# EAGLE board OBI_SlaveBoard_rev1 (EAGLE 7.2.0)
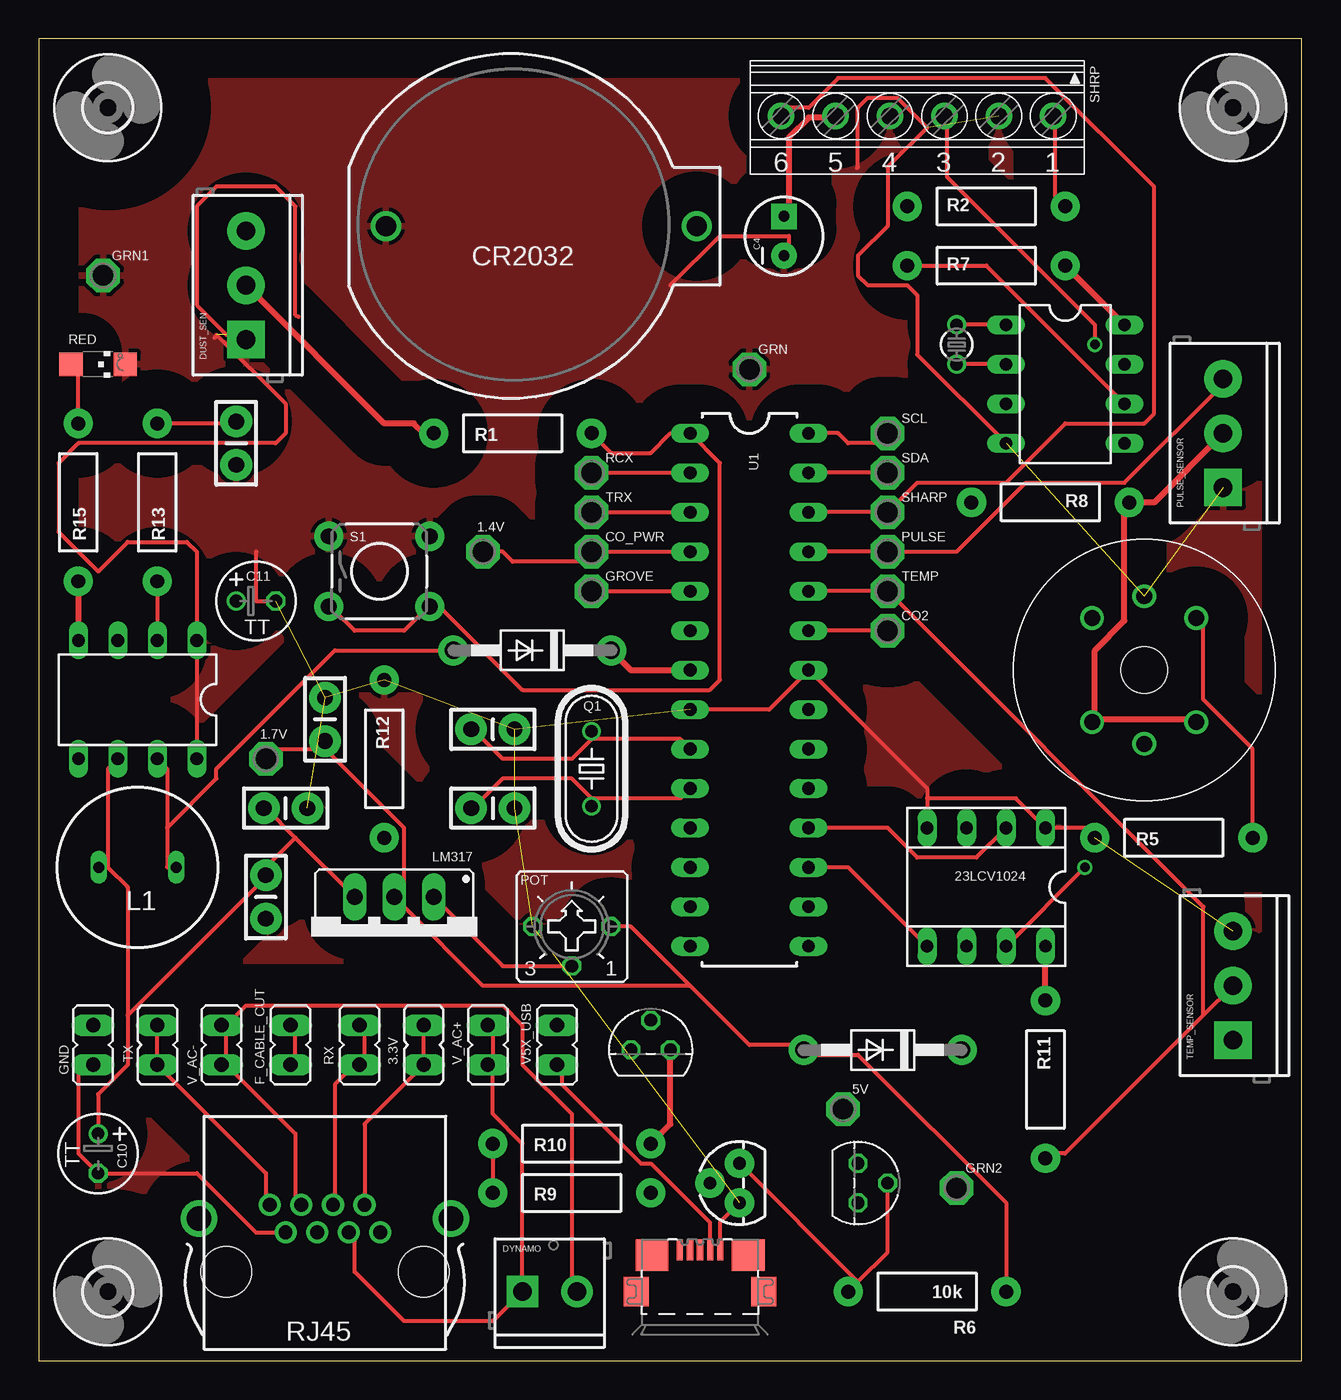
[diagram p0: board, top side]
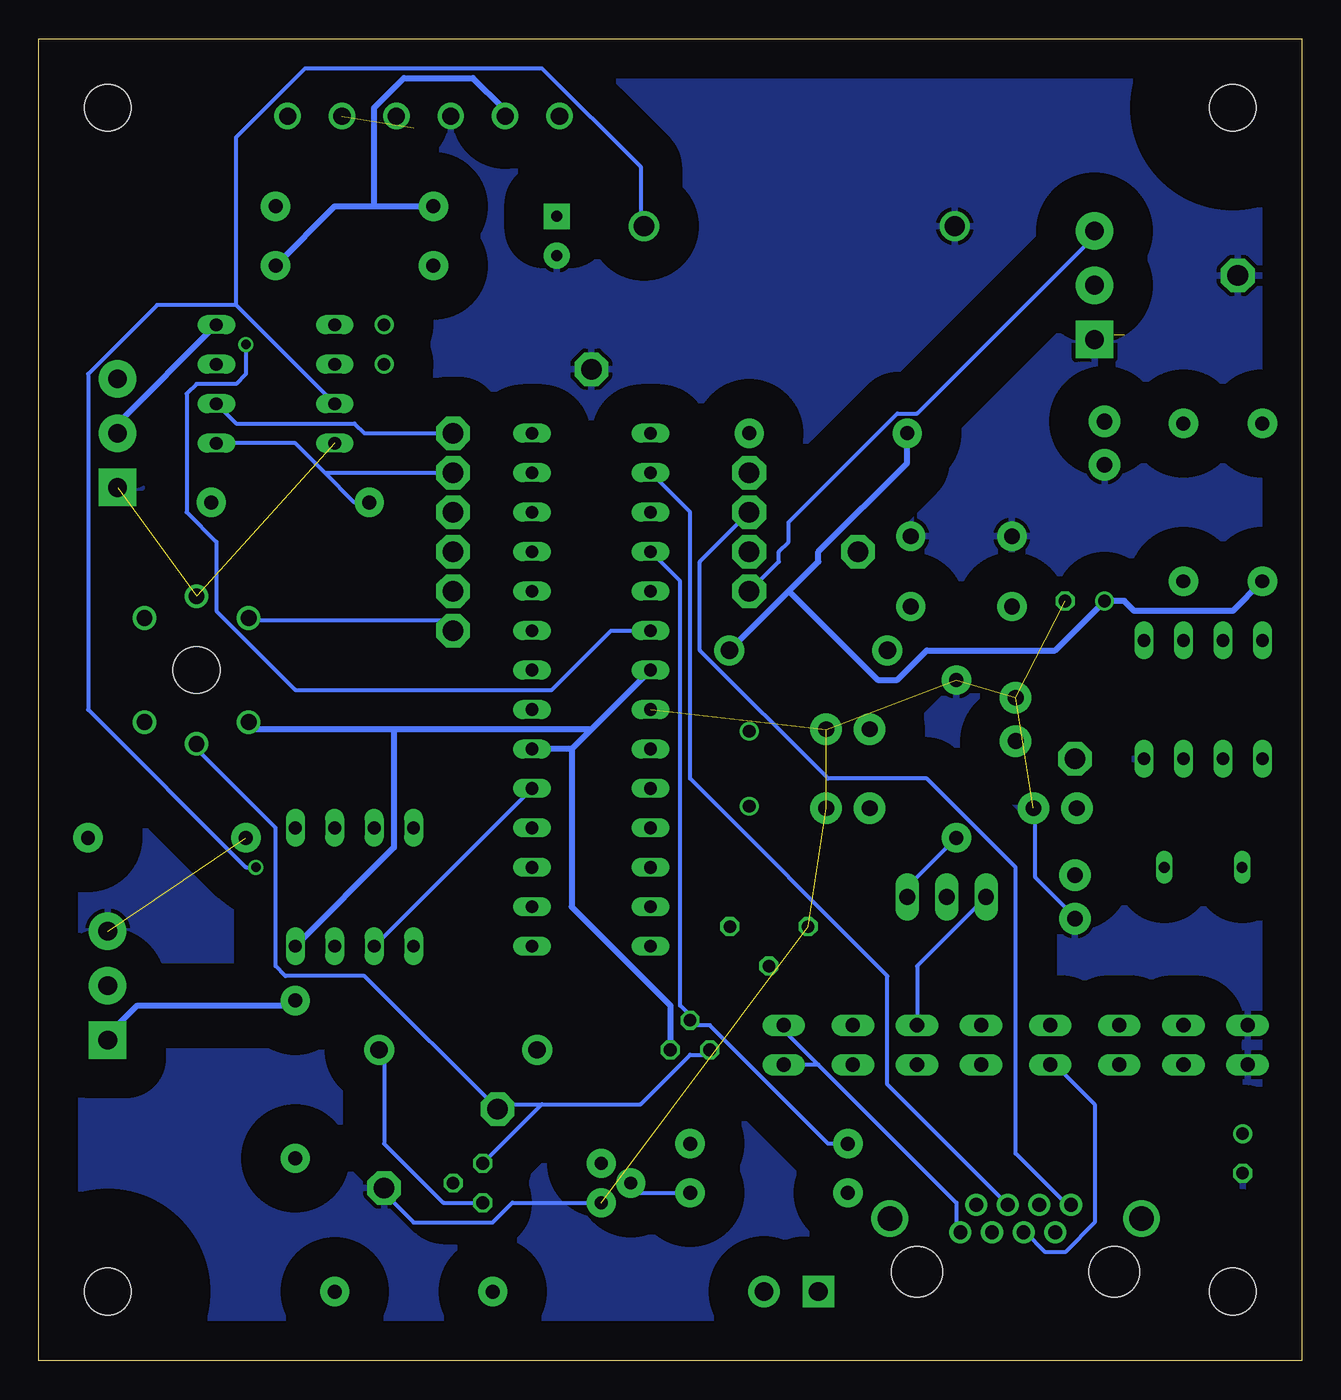
[diagram p1: board, bottom side, seen from below]

Size 81.27 x 85.08 mm. Coordinates in mm from the lower left corner, seen from the top.
Outline: 0,0 81.27,0 81.27,85.08 0,85.08 0,0
Copper layers (1*16): Top 0.0356mm / dielectric 1.5011mm / Bottom 0.0356mm
Design rules "OSH-Park-2-layer": minimum track width 6mil, minimum drill 13mil, track to track 6mil, track to pad 6mil, pad to pad 6mil, via to via 6mil, smd to smd 6mil, copper to edge 15mil, drill to drill 6mil, minimum pad ring 7mil, minimum via ring 7mil, stop-mask expansion 3mil, vias tented up to drill 0mil, thermal gap 10mil
Net classes: 1 Power: width 0.381 mm

## Footprints (pad centres in the part's own frame; a part is rotated, then mirrored left to right if it is on the bottom)
P1-13 = drill 1.321 pad 2.159 octagon: TP 0,0
JP1 = drill 0.914 long: 1 0,-1.27; 2 0,1.27
SOCKET-08 = drill 0.813 long: 1 -3.81,-3.81; 2 -1.27,-3.81; 3 1.27,-3.81; 4 3.81,-3.81; 5 3.81,3.81; 6 1.27,3.81; 7 -1.27,3.81; 8 -3.81,3.81
CAP-PTH-SMALL-KIT = drill 1.016 pad 2.032: 1 -1.397,0; 2 1.397,0
CPOL-RADIAL-10UF-25V = drill 0.7 pad 1.651 square: 1 1.27,0 | drill 0.7 pad 1.651: 2 -1.27,0
TT2D5 = drill 0.813: + -1.27,0 | drill 0.813 octagon: - 1.27,0
MQ-3 = drill 1.016: A1 -3.35,3.35; A2 -3.35,-3.35; B1 3.35,3.35; B2 3.35,-3.35; HA -4.75,0; HB 4.75,0 | hole 3: 0,0
BATTCOM_20MM_PTH = drill 1.3: 1 11.85,0; 2 -8.15,0
DO41-10 = drill 1.118 pad 1.93: A 5.08,0; C -5.08,0
SCREWTERMINAL-3.5MM-3 = drill 1.2 pad 2.413 square: 1 0,0 | drill 1.2 pad 2.413: 2 3.5,0; 3 7,0
SCREWTERMINAL-3.5MM-2 = drill 1.2 pad 2.032 square: 1 0,0 | drill 1.2 pad 2.032: 2 3.5,0
DIL08 = drill 0.813 long: 1 -3.81,-3.81; 2 -1.27,-3.81; 3 1.27,-3.81; 4 3.81,-3.81; 5 3.81,3.81; 6 1.27,3.81; 7 -1.27,3.81; 8 -3.81,3.81
BS11 = drill 0.7 long: 1 -2.5,0; 2 2.5,0
317TS = drill 1.016 long: 1 -2.54,-2.54; 2 0,-2.54; 3 2.54,-2.54
ZX62R-B-5P = smd 1.35 x 0.4: 1 2.675,-1.3; 2 2.675,-0.65; 3 2.675,0; 4 2.675,0.65; 5 2.675,1.3 | smd 1.9 x 1.6: M1 0,-4.1; M2 0,4.1 | smd 2 x 2.1: M3 2.35,3.1; M4 2.35,-3.1
CT6 = drill 0.813 octagon: A 2.515,0; E -2.515,0; S 0,-2.54
HC49/S = drill 0.813: 1 -2.413,0; 2 2.413,0
TO-92 = drill 0.813 pad 1.88: 1 -1.27,0; 2 0,1.905; 3 1.27,0
TO92 = drill 0.813 octagon: 1 1.27,0; 2 0,1.905; 3 -1.27,0
TC26V = drill 0.813: 1 -1.27,0; 2 1.27,0
AXIAL-0.4 = drill 0.9 pad 1.88: P$1 -5.08,0; P$2 5.08,0
CHIPLED_1206 = smd 1.5 x 1.5: A 0,-1.75; C 0,1.75
0446200002 = drill 0.889 pad 1.422: 1 3.556,2.54; 2 2.54,4.318; 3 1.524,2.54; 4 0.508,4.318; 5 -0.508,2.54; 6 -1.524,4.318; 7 -2.54,2.54; 8 -3.556,4.318 | drill 1.575 pad 2.286: S@1 -8.103,3.429; S@2 8.103,3.429 | hole 3.251: 6.35,0; -6.35,0
TACTILE-PTH = drill 1.016 pad 1.88: 1 -3.251,2.261; 2 3.251,2.261; 3 -3.251,-2.261; 4 3.251,-2.261
1751280 = drill 1.1 pad 1.7: 1 -8.75,-0.1; 2 -5.25,-0.1; 3 -1.75,-0.1; 4 1.75,-0.1; 5 5.25,-0.1; 6 8.75,-0.1
DIL28-3 = drill 0.813 long: 1 -16.51,-3.81; 2 -13.97,-3.81; 3 -11.43,-3.81; 4 -8.89,-3.81; 5 -6.35,-3.81; 6 -3.81,-3.81; 7 -1.27,-3.81; 8 1.27,-3.81; 9 3.81,-3.81; 10 6.35,-3.81; 11 8.89,-3.81; 12 11.43,-3.81; 13 13.97,-3.81; 14 16.51,-3.81; 15 16.51,3.81; 16 13.97,3.81; 17 11.43,3.81; 18 8.89,3.81; 19 6.35,3.81; 20 3.81,3.81; 21 1.27,3.81; 22 -1.27,3.81; 23 -3.81,3.81; 24 -6.35,3.81; 25 -8.89,3.81; 26 -11.43,3.81; 27 -13.97,3.81; 28 -16.51,3.81
3,0 = hole 3: 0,0

## Placement (x,y rotation side)
1.4V  TPPAD1-13  [P1-13]  28.57,52.07 0 top
1.7V  TPPAD1-13  [P1-13]  14.61,38.73 0 top
3.3V  [JP1]  24.77,20.32 0 top
5V  TPPAD1-13  [P1-13]  51.75,16.19 0 top
23LCV1024  [SOCKET-08]  60.96,30.48 180 top
C1  22pF  [CAP-PTH-SMALL-KIT]  29.21,40.64 180 top
C2  22pF  [CAP-PTH-SMALL-KIT]  29.21,35.56 0 top
C4  220uF  [CPOL-RADIAL-10UF-25V]  47.94,72.39 90 top
C5  0.1uF  [CAP-PTH-SMALL-KIT]  15.88,35.56 180 top
C6  1uF  [CAP-PTH-SMALL-KIT]  18.41,41.27 270 top
C8  0.01uF  [CAP-PTH-SMALL-KIT]  12.7,59.05 90 top
C9  0.1uF  [CAP-PTH-SMALL-KIT]  14.61,29.84 270 top
C10  100uF  [TT2D5]  3.81,13.34 270 top
C11  100uF  [TT2D5]  13.97,48.9 0 top
CO2  TPPAD1-13  [P1-13]  54.61,46.99 0 top
CO2_SENSOR  METHANE_SENSOR  [MQ-3]  71.12,44.45 90 top
CO_PWR  TPPAD1-13  [P1-13]  35.56,52.07 0 top
CR2032  [BATTCOM_20MM_PTH]  30.48,73.03 0 top
D1  1N5817-B  [DO41-10]  31.75,45.72 180 top
D4  1N5817-B  [DO41-10]  54.29,20 180 top
DUST_SEN  [SCREWTERMINAL-3.5MM-3]  13.34,65.72 90 top
DYNAMO  [SCREWTERMINAL-3.5MM-2]  31.11,4.45 0 top
F_CABLE_CUT  [JP1]  16.19,20.32 0 top
FRAME1  FRAME-LEDGER  [CREATIVE_COMMONS]  -66.04,-27.94 0 top  (outside the outline)
GND  [JP1]  3.49,20.32 0 top
GRN  TPPAD1-13  [P1-13]  45.72,63.82 0 top
GRN1  TPPAD1-13  [P1-13]  4.13,69.85 0 top
GRN2  TPPAD1-13  [P1-13]  59.05,11.11 0 top
GROVE  TPPAD1-13  [P1-13]  35.56,49.53 0 top
IC2  DS1307  [DIL08]  66.04,62.87 270 top
L1  10uH  [BS11]  6.35,31.75 180 top
LM317  [317TS]  22.86,27.3 180 top
MICROB  MICRO-USB-ZX62R-B-5P  [ZX62R-B-5P]  42.55,4.45 90 top
POT  10k  [CT6]  34.29,27.94 0 top
PULSE  TPPAD1-13  [P1-13]  54.61,52.07 0 top
PULSE_SENSOR  [SCREWTERMINAL-3.5MM-3]  76.2,56.2 90 top
Q1  [HC49/S]  35.56,38.1 90 top
Q3  2N3904  [TO-92]  45.09,11.43 90 top
Q4  BSS110  [TO92]  52.7,11.43 270 top
Q5  BSS110  [TO92]  39.37,20 0 top
Q6  32.768 kHz  [TC26V]  59.05,65.41 270 top
R1  10K  [AXIAL-0.4]  30.48,59.69 180 top
R2  150  [AXIAL-0.4]  60.96,74.3 0 top
R5  10K  [AXIAL-0.4]  73.03,33.66 180 top
R6  10k  [AXIAL-0.4]  57.15,4.45 180 top
R7  4.7k  [AXIAL-0.4]  60.96,70.48 0 top
R8  4.7k  [AXIAL-0.4]  65.09,55.24 0 top
R9  4.7k  [AXIAL-0.4]  34.29,10.79 180 top
R10  10k  [AXIAL-0.4]  34.29,13.97 180 top
R11  10K  [AXIAL-0.4]  64.77,18.1 90 top
R12  220  [AXIAL-0.4]  22.23,38.73 90 top
R13  20k  [AXIAL-0.4]  7.62,55.24 270 top
R15  180  [AXIAL-0.4]  2.54,55.24 270 top
RCX  TPPAD1-13  [P1-13]  35.56,57.15 0 top
RED  [CHIPLED_1206]  3.81,64.14 270 top
RJ45  0446200002  [0446200002]  18.41,5.71 0 top
RX  [JP1]  20.64,20.32 0 top
S1  [TACTILE-PTH]  21.91,50.8 0 top
SCL  TPPAD1-13  [P1-13]  54.61,59.69 0 top
SDA  TPPAD1-13  [P1-13]  54.61,57.15 0 top
SHARP  TPPAD1-13  [P1-13]  54.61,54.61 0 top
SHRP  1751280  [1751280]  56.52,80.01 180 top
TEMP  TPPAD1-13  [P1-13]  54.61,49.53 0 top
TEMP_SENSOR  [SCREWTERMINAL-3.5MM-3]  76.83,20.64 90 top
TRX  TPPAD1-13  [P1-13]  35.56,54.61 0 top
TX  [JP1]  7.62,20.32 0 top
U1  ATMEGA328P_PDIP  [DIL28-3]  45.72,43.18 270 top
U$1  [3,0]  4.45,4.45 0 top
U$2  [3,0]  4.45,80.64 0 top
U$3  [3,0]  76.83,80.64 0 top
U$4  [3,0]  76.83,4.45 0 top
V5X_USB  [JP1]  33.34,20.32 0 top
V_AC+  [JP1]  28.89,20.32 0 top
V_AC-  [JP1]  11.75,20.32 0 top
V_BOOST  LT1302  [DIL08]  6.35,42.55 180 top

## Library data of the parts
1.4V 1.7V 5V CO2 CO_PWR GRN GRN1 GRN2 GROVE PULSE RCX SCL SDA SHARP TEMP TRX = testpad
3.3V F_CABLE_CUT GND RX TX V5X_USB V_AC+ V_AC- = jumper
23LCV1024 = ic-package
C1 = SparkFun-Passives; C1: 22pF
C2 = SparkFun-Passives; C2: 22pF
C4 = SparkFun-Capacitors
C5 C6 C8 C9 R1 R5 R7 R8 R15 = SparkFun-Passives
C10 C11 = rcl
CO2_SENSOR = SparkFun-Sensors
CR2032 = SparkFun-Electromechanical
D1 D4 IC2 RED V_BOOST = adafruit
DUST_SEN PULSE_SENSOR TEMP_SENSOR = SparkFun-Connectors
DYNAMO = SparkFun-Connectors; PROD_ID: CONN-08399
FRAME1 = SparkFun-Aesthetics
L1 = inductor-neosid; OC_FARNELL: unknown; OC_NEWARK: unknown
LM317 = v-reg
MICROB = con-hirose
POT = pot
Q1 = crystal; OC_FARNELL: 1667008; OC_NEWARK: unknown
Q3 = SparkFun-DiscreteSemi; PROD_ID: TRANS-08447
Q4 Q5 = transistor-fet
Q6 = crystal; OC_FARNELL: unknown; OC_NEWARK: unknown
R2 R6 R9-R13 = SparkFun-Resistors
RJ45 = con-molex; MF: MOLEX; MPN: 0446200002; OC_FARNELL: 9251910
S1 = SparkFun-Retired
SHRP = con-phoenix-350; MPN: 1751280; OC_FARNELL: unknown; OC_NEWARK: 27R1765
U1 = SparkFun-DigitalIC
U$1-U$4 = holes

## Nets
1.7V: 1.7V.TP C6.2 D4.A LM317.2 POT.A R6.P$1
3.3V: 3.3V.1 3.3V.2 C5.2 C9.1 C10.+ L1.2 LM317.3 RJ45.2 V_BOOST.6
5V [Power]: 23LCV1024.8 C4.1 C11.+ CO2_SENSOR.A1 CO2_SENSOR.A2 D1.C DUST_SEN.2 IC2.8 PULSE_SENSOR.2 Q5.1 R1.P$2 R2.P$1 R7.P$2 R8.P$2 R10.P$1 R11.P$2 R15.P$2 SHRP.5 TEMP_SENSOR.1 U1.7 U1.20 V_BOOST.4
CO2: CO2.TP CO2_SENSOR.B1 U1.23
CO_PWR: 5V.TP CO2_SENSOR.HA Q4.3 Q5.3
CO_PWR_SEL: 1.4V.TP CO_PWR.TP Q5.2 R9.P$2 R10.P$2 U1.4
F_CABLE_CUT: F_CABLE_CUT.1 F_CABLE_CUT.2 RJ45.5
GND: 23LCV1024.1 23LCV1024.4 C1.1 C2.2 C4.2 C5.1 C6.1 C8.1 C9.2 C10.- C11.- CO2_SENSOR.HB CR2032.2 DUST_SEN.1 GND.1 GND.2 GRN1.TP GRN2.TP GRN.TP IC2.4 MICROB.1 POT.E PULSE_SENSOR.1 Q3.1 R5.P$2 R12.P$2 RED.C RJ45.7 S1.1 S1.2 SHRP.2 SHRP.4 TEMP_SENSOR.3 U1.8 U1.22 V_BOOST.1 V_BOOST.8
GROVE: DUST_SEN.3 GROVE.TP U1.5
MISO: 23LCV1024.2 U1.18
MOSI: 23LCV1024.5 U1.17
N$1: IC2.1 Q6.1
N$2: Q3.3 Q4.2 R6.P$2
N$3: C1.2 Q1.2 U1.9
N$4: Q3.2 R9.P$1
N$5: C2.1 Q1.1 U1.10
N$6: IC2.2 Q6.2
N$7: R15.P$1 RED.A
N$8: R2.P$2 SHRP.1
N$9: LM317.1 POT.S R12.P$1
N$14: R13.P$2 V_BOOST.2
N$15: D4.C Q4.1
N$17: CO2_SENSOR.B2 R5.P$1
N$18: C8.2 R13.P$1
N$22: D1.A L1.1 V_BOOST.7
PULSE: PULSE.TP PULSE_SENSOR.3 U1.25
RESET: R1.P$1 S1.3 S1.4 U1.1
RX: RCX.TP RJ45.4 RX.1 RX.2 U1.2
SCK: 23LCV1024.6 U1.19
SCL: IC2.6 R7.P$1 SCL.TP U1.28
SDA: IC2.5 R8.P$1 SDA.TP U1.27
SHARP: SHARP.TP SHRP.6 U1.26
SHARP_LED: SHRP.3 U1.6
TEMP: R11.P$1 TEMP.TP TEMP_SENSOR.2 U1.24
TX: RJ45.8 TRX.TP TX.1 TX.2 U1.3
V5X_USB: MICROB.2 RJ45.1 V5X_USB.1 V5X_USB.2
V_AC+: DYNAMO.1 RJ45.3 V_AC+.1 V_AC+.2
V_AC-: DYNAMO.2 RJ45.6 V_AC-.1 V_AC-.2
V_BATT: 23LCV1024.7 CR2032.1 IC2.3

## Tracks (layer width: path | path; a pad name or v marks a point on that pad's centre or on a via)
1.7V
  Top 0.254: 18.41,39.37 15.24,39.37 1.7V.TP | POT.A 38.1,27.94 41.91,24.13 | 41.91,24.13 45.72,20.32 48.9,20.32 D4.A 49.53,19.68 52.7,19.68 62.23,10.16 R6.P$1 | 23.5,29.21 28.57,24.13 41.91,24.13 | 18.41,39.37 23.5,34.29 23.5,29.21 | 18.41,39.37 C6.2 | 23.5,29.21 LM317.2
3.3V
  Top 0.254: RJ45.2 20.95,15.24 3.3V.1 3.3V.2 | 16.51,33.66 14.61,35.56 C5.2 | 16.51,33.66 LM317.3 | 16.51,33.66 14.61,31.75 C9.1 14.61,31.11 5.71,22.23 | 4.45,31.75 4.45,38.1 V_BOOST.6 | C10.+ 3.81,17.14 5.71,19.05 5.71,22.23 | 5.71,22.23 5.71,30.48 4.45,31.75 | 4.45,31.75 L1.2
  Bottom 0.254: 3.3V.2 24.77,25.4 LM317.3
5V
  Top 0.381: PULSE_SENSOR.2 71.75,55.24 R8.P$2 69.85,55.24 69.85,47.62 67.94,45.72 67.94,41.27 | C4.1 48.26,73.66 48.26,78.74 49.53,80.01 50.8,80.01 SHRP.5 | R7.P$2 IC2.8 | R11.P$2 23LCV1024.8 | R15.P$2 V_BOOST.4 | Q5.1 40.64,15.24 R10.P$1 | 67.94,41.27 74.3,41.27 CO2_SENSOR.A2 | U1.7 38.1,44.45 D1.C | R1.P$2 24.77,59.69 24.13,60.33 22.23,60.33 DUST_SEN.2 | 67.94,41.27 CO2_SENSOR.A1
  Bottom 0.381: 59.69,74.3 62.23,74.3 R7.P$2 | 59.69,74.3 R2.P$1 | 59.69,74.3 59.69,80.64 57.78,82.55 53.34,82.55 51.44,80.64 SHRP.5 | IC2.8 76.2,60.33 PULSE_SENSOR.2 | R11.P$2 64.77,22.86 74.93,22.86 76.83,20.95 TEMP_SENSOR.1 | R15.P$2 4.45,48.26 10.79,48.26 11.43,48.9 C11.+ 15.88,45.72 24.13,45.72 26.04,43.81 27.3,43.81 33.02,49.53 | 46.99,39.37 U1.20 | U1.7 45.72,40.64 | 45.72,40.64 46.99,39.37 | R1.P$2 25.4,57.78 31.11,52.07 31.11,51.44 33.02,49.53 | D1.C 33.02,49.53 | 45.72,40.64 58.42,40.64 | 58.42,40.64 67.31,40.64 CO2_SENSOR.A1 | Q5.1 40.64,22.86 46.99,29.21 46.99,39.37 | 23LCV1024.8 58.42,33.02 58.42,40.64
CO2
  Top 0.254: CO2.TP U1.23
  Bottom 0.254: CO2.TP 55.24,47.62 67.31,47.62 CO2_SENSOR.B1
CO_PWR
  Bottom 0.254: 48.9,16.51 51.44,16.51 5V.TP 60.33,24.77 65.41,24.77 66.04,25.4 66.04,34.29 71.12,39.37 CO2_SENSOR.HA | 48.9,16.51 42.55,16.51 39.37,19.68 38.1,19.68 Q5.3 | 48.9,16.51 Q4.3
CO_PWR_SEL
  Top 0.254: U1.4 CO_PWR.TP 34.92,51.44 30.48,51.44 29.84,52.07 1.4V.TP | R10.P$2 R9.P$2
  Bottom 0.254: R10.P$2 30.48,13.97 38.1,21.59 39.37,21.59 Q5.2 39.37,22.23 40.01,22.86 40.01,50.16 U1.4
F_CABLE_CUT
  Top 0.254: F_CABLE_CUT.2 16.51,21.59 16.51,19.05 F_CABLE_CUT.1
  Bottom 0.254: RJ45.5 17.78,8.26 16.51,6.99 15.24,6.99 13.34,8.89 13.34,16.51 15.88,19.05 F_CABLE_CUT.1
GND  (13 unrouted)
  Top 0.254: 57.15,36.2 57.15,36.83 U1.22 46.99,41.91 U1.8 | 57.15,36.2 23LCV1024.4 | V_BOOST.8 V_BOOST.1 10.16,52.07 9.53,52.7 5.71,52.7 3.81,50.8 1.27,53.34 1.27,57.78 2.54,59.05 15.24,59.05 15.88,59.69 15.88,61.59 11.43,66.04 11.31,65.83 | Q3.1 43.81,8.89 43.81,7.62 MICROB.1 | R5.P$2 67.31,34.29 23LCV1024.1 62.87,36.2 57.15,36.2 | GND.1 3.17,19.05 2.54,18.41 2.54,13.34 C10.- 10.16,12.06 13.97,8.26 RJ45.7 | C11.- 13.97,48.9 13.97,52.07 14.01,52.07 | IC2.4 56.52,64.77 56.52,68.58 55.88,69.22 53.34,69.22 52.7,69.85 52.7,71.12 54.61,73.03 54.61,76.83 57.15,79.38 55.24,81.28 53.34,81.28 52.7,80.64 52.7,76.83 52.65,76.76 | 40.64,69.22 43.81,72.39 48.26,72.39 48.26,71.12 C4.2 | DUST_SEN.1 13.34,66.04 12.06,66.04 10.16,67.94 10.16,74.3 11.43,75.56 15.24,75.56 16.51,74.3 16.51,67.31 16.72,67.19
  Bottom 0.254: C5.1 17.14,35.56 17.14,31.11 14.61,28.57 C9.2 | Q3.1 50.8,10.16 52.07,8.89 57.15,8.89 59.05,10.79 GRN2.TP
  pour Top (isolate 2.54): -0.95,-0.95 -0.95,86.04 82.23,86.04 82.23,-0.95
  pour Bottom (isolate 2.54): -1.27,86.68 82.87,86.68 82.87,-1.59 -1.91,-1.59 -1.91,86.68
GROVE
  Top 0.254: GROVE.TP U1.5
  Bottom 0.254: GROVE.TP 33.66,51.44 33.66,52.07 33.02,52.7 33.02,53.98 26.04,60.96 24.77,60.96 13.34,72.39 DUST_SEN.3
MISO
  Top 0.254: U1.18 54.61,34.29 56.52,32.38 60.33,32.38 23LCV1024.2
MOSI
  Top 0.254: U1.17 52.07,31.75 23LCV1024.5
N$1
  Top 0.254: IC2.1 Q6.1
N$2
  Top 0.254: Q4.2 54.61,6.99 52.7,5.08 | 52.7,5.08 Q3.3 | 52.7,5.08 R6.P$2
N$3
  Top 0.254: 35.56,40.01 41.27,40.01 U1.9 | 35.56,40.01 34.29,38.73 29.84,38.73 27.94,40.64 C1.2 | 35.56,40.01 Q1.2
N$4
  Bottom 0.254: R9.P$1 42.55,10.79 Q3.2
N$5
  Top 0.254: 35.56,36.2 41.27,36.2 U1.10 | 35.56,36.2 34.29,37.47 29.84,37.47 27.94,35.56 C2.1 | 35.56,36.2 Q1.1
N$6
  Top 0.254: IC2.2 Q6.2
N$7
  Top 0.254: R15.P$1 2.54,64.14 RED.A
N$8
  Top 0.254: R2.P$2 65.41,74.93 65.41,80.01 SHRP.1
N$9
  Top 0.254: POT.S 29.84,25.4 LM317.1
  Bottom 0.254: R12.P$1 25.4,30.48 LM317.1
N$14
  Top 0.254: R13.P$2 V_BOOST.2
N$15
  Bottom 0.254: Q4.1 55.24,10.16 59.05,13.97 59.05,19.68 D4.C
N$17
  Top 0.254: R5.P$1 78.11,39.37 74.93,42.55 74.93,47.62 CO2_SENSOR.B2
N$18
  Top 0.254: R13.P$1 12.7,60.33 C8.2
N$22
  Top 0.254: 8.26,34.29 8.26,38.1 V_BOOST.7 | 8.26,34.29 8.26,31.75 L1.1 | D1.A 19.05,45.72 11.43,38.1 11.43,37.47 8.26,34.29
PULSE
  Top 0.254: U1.25 PULSE.TP 59.05,52.07 63.5,56.52 69.85,56.52 76.2,62.87 PULSE_SENSOR.3
RESET
  Top 0.254: R1.P$1 36.83,58.42 39.37,58.42 40.64,59.69 U1.1 43.81,57.78 43.81,43.81 43.18,43.18 31.11,43.18 25.4,48.9 S1.4 24.77,48.26 23.5,46.99 20.32,46.99 19.05,48.26 S1.3
RX
  Top 0.254: RCX.TP U1.2 | RJ45.4 19.05,10.16 19.05,17.78 20.32,19.05 RX.1 20.95,19.05 20.95,21.59 RX.2
  Bottom 0.254: U1.2 39.37,54.61 39.37,37.47 26.67,24.77 26.67,17.78 RJ45.4
SCK
  Bottom 0.254: 23LCV1024.6 U1.19
SCL
  Top 0.254: U1.28 51.44,59.69 52.07,59.05 53.98,59.05 SCL.TP | IC2.6 60.96,70.48 R7.P$1
  Bottom 0.254: SCL.TP 60.33,59.69 60.96,60.33 68.58,60.33 IC2.6
SDA
  Top 0.254: SDA.TP U1.27
  Bottom 0.254: IC2.5 64.77,59.05 62.87,57.15 | 62.87,57.15 60.96,55.24 R8.P$1 | 62.87,57.15 SDA.TP
SHARP
  Top 0.254: U1.26 SHARP.TP 56.52,56.52 62.23,56.52 66.04,60.33 71.12,60.33 71.75,60.96 71.75,75.56 64.77,82.55 51.44,82.55 49.53,80.64 48.26,80.64 SHRP.6
SHARP_LED  (via drill 0.61)
  Top 0.254: v67.94,65.41 67.94,66.67 58.42,76.2 58.42,80.01 SHRP.3
  Bottom 0.254: U1.6 44.45,46.99 48.26,43.18 64.77,43.18 69.85,48.26 69.85,52.7 71.75,54.61 71.75,62.23 71.12,62.87 68.58,62.87 67.94,63.5 v67.94,65.41
TEMP
  Top 0.254: U1.24 TEMP.TP 74.93,29.21 74.93,22.23 | 74.93,22.23 TEMP_SENSOR.2 | 74.93,22.23 66.04,13.34 64.77,13.34 R11.P$1
TX
  Top 0.254: TRX.TP U1.3 | RJ45.8 14.61,10.16 14.61,12.06 TX.1 TX.2
  Bottom 0.254: TRX.TP 38.73,51.44 38.73,45.72 30.48,37.47 24.13,37.47 18.41,31.75 18.41,13.34 15.24,10.16 RJ45.8
V5X_USB
  Top 0.254: MICROB.2 43.18,7.62 43.18,8.89 39.37,12.7 38.73,12.7 33.66,17.78 33.66,19.05 V5X_USB.1
  Bottom 0.254: 31.11,19.05 33.66,21.59 V5X_USB.2 | 31.11,19.05 22.23,10.16 22.23,8.26 RJ45.1 | 31.11,19.05 V5X_USB.1
V_AC+
  Top 0.254: 29.21,19.05 29.21,21.59 V_AC+.2 | RJ45.3 20.32,8.26 20.32,5.71 23.5,2.54 29.21,2.54 DYNAMO.1 31.11,13.97 29.21,15.88 29.21,19.05 | 29.21,19.05 V_AC+.1
V_AC-
  Top 0.254: 12.06,19.05 16.51,14.61 16.51,10.16 RJ45.6 | 12.06,19.05 12.06,21.59 | 12.06,19.05 V_AC-.1 | 12.06,21.59 13.34,22.86 29.84,22.86 31.11,21.59 31.11,19.05 34.29,15.88 34.29,4.45 DYNAMO.2 | 12.06,21.59 V_AC-.2
V_BATT  (via drill 0.61)
  Top 0.254: v67.31,31.75 23LCV1024.7
  Bottom 0.254: v67.31,31.75 67.94,31.75 78.11,41.91 78.11,63.5 73.66,67.94 68.58,67.94 | IC2.3 68.58,67.94 | 68.58,67.94 68.58,78.74 64.14,83.19 48.9,83.19 42.55,76.83 42.55,73.03 CR2032.1